# Altium PCB Panel5.PcbDoc
Units mm, origin at the board's own origin, x right, y up, seen from the top; angles counter-clockwise.
Board outline 275.21 x 86.74 mm, 2 copper layers (Top Layer, Bottom Layer); 25 components, 21 nets, 92 pads, 0 vias.
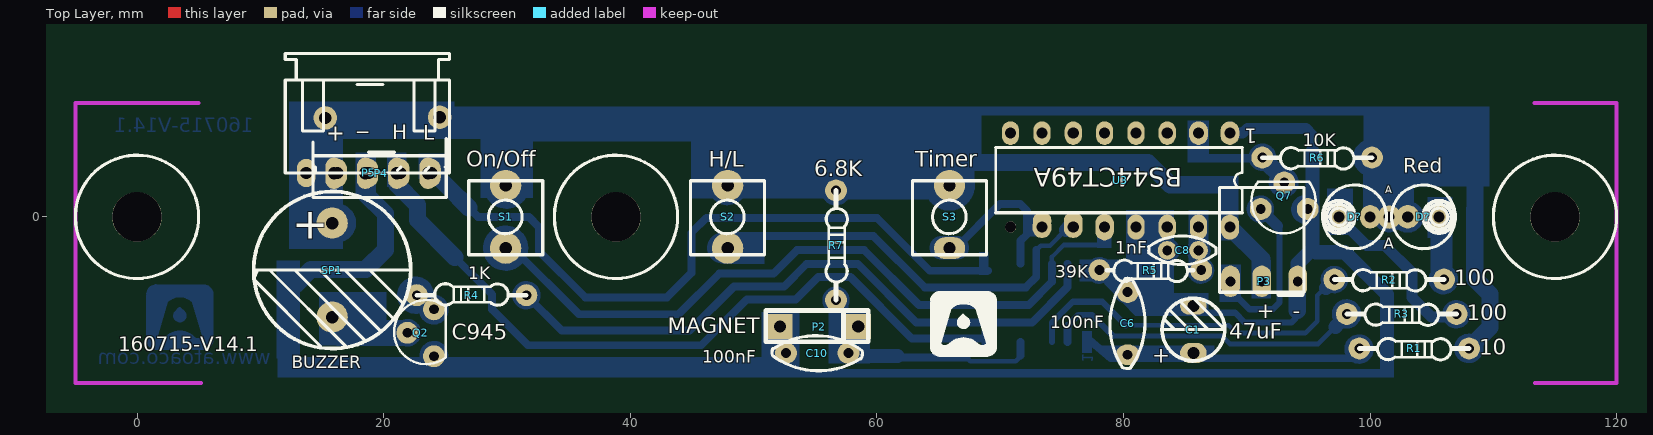
[diagram p0: Top Layer view]
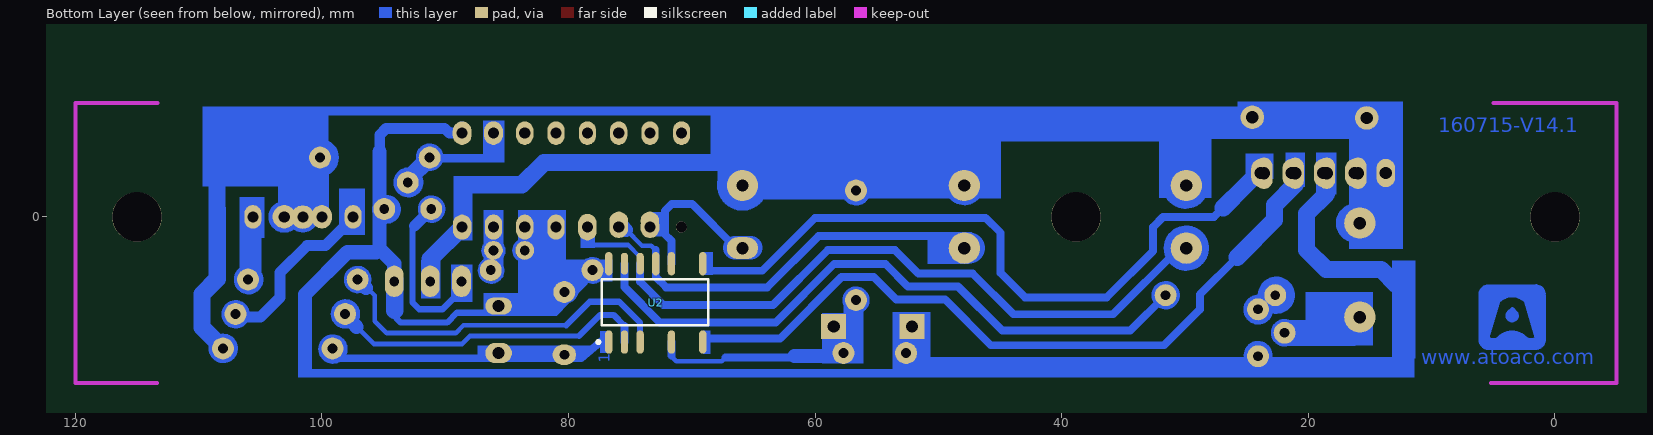
[diagram p1: Bottom Layer view, seen from below]

## Layer stack, top to bottom
Top Layer: signal copper 0.0356
Dielectric: dielectric 0.32, FR-4, Dk 4.8
Bottom Layer: signal copper 0.0356

## Board outline
172.998,27.107 -101.83,27.107 -101.83,-59.634 172.363,-59.634 173.379,-58.618

## Design rules (kind name [scope] priority, off if disabled: settings)
Clearance [All] p1: gap=0.254
PolygonConnect [All] p1: connectstyle=Relief reliefconductorwidth=0.254 reliefentries=4 polygonreliefangle="90 Angle"
RoutingVias [All] p1: holewidth=0.711 width=1.27 viastyle="Through Hole" minholewidth=0.711 minwidth=1.27 maxholewidth=0.711 maxwidth=1.27
SolderMaskExpansion [All] p1: expansion=0.102
TestPointUsage [All] p1: valid=0 allowmultiple=FALSE
Testpoint [All] p1: side=15 testpointundercomponent=TRUE minsize=1.016 maxsize=2.54 preferedsize=1.524 minholesize=0 maxholesize=1.016 preferedholesize=0.813 testpointgrid=0.025 style=1023 order=0123456789
Width [All] p1: maxlimit=1.905 minlimit=0.254 preferedwidth=0.254 toplayer_maxwidth=0.254 bottomlayer_prefwidth=0.508 minimp=50.000000 maximp=50.000000 favimp=50.000000
19 further rules are at their usual default settings.

## Components (designator, comment, footprint, x,y, rotation, side; value= is the part's Value field where it differs from the comment)
C1 "47uF" RB.15/.2 85.678,-10.414 r90 top locked
C6 "100nF" RAD0.2#1 80.344,-6.102 r270 top
C8 "1nF" RAD0.1 83.554,-2.724 r0 top locked
C10 "100nF" RAD0.2#2 52.625,-11.049 r0 top
D? "Red" LED0.5#1 104.332,0 r0 top (schematic designator Dred)
D? "Green" LED0.5#2 98.744,0 r180 top (schematic designator Dred)
P2 "Magnet" Magnet 58.5,-8.896 r180 top
P3 "IrReceiver" IRREC1 91.215,0 r0 top locked
P4 "Header 4" CON4 15.98,3.534 r270 top locked
P5 "Header 5" xH5RA 13.716,3.556 r270 top (schematic designator P4)
Q2 "C945" TO92BS2 23.448,-9.404 r270 top
Q7 "2N3904" TO92BS1 93.044,1.264 r0 top
R1 "10" RES0.35 99.14,-10.674 r0 top
R2 "100" RES0.35 97.108,-5.086 r0 top
R3 "100" RES0.35 98.124,-7.88 r0 top
R4 "1K" RES0.35 31.576,-6.356 r180 top
R5 "39K" RES0.325 78.058,-4.324 r0 top
R6 "10K" RES0.35 91.266,4.804 r0 top
R7 "6.8K" RES0.35 56.689,-6.753 r90 top
S1 "On/Off" PUSHBOT2#1 29.9,0 r270 top locked
S2 "H/L" PUSHBOT2#1 47.9,0 r270 top locked
S3 "Timer" PUSHBOT2#2 65.9,0 r270 top locked
SP1 "BUZZER" Buzzer).3/.6 15.828,-4.318 r270 top
U2 "ATtiny24A-SSU" SOIC14 76.738,-10.155 r90 bottom
U3 "BS44CT49A" DIP16 79.734,2.977 r180 top locked

## Footprints (in the part's own frame and the unit in brackets; to place one, negate y for a bottom-side part, rotate by r counter-clockwise, add the part's x,y. Pads: shape width x height; smd on the part's side, far side on the other; paste and mask are expansions set on the pad)
Buzzer).3/.6 [mil]
  round 100 hole 40: 1(150,0) 2(-150,0)
  silkscreen extent -251,-251 251,251
CON4 [mm] "100mil between pins"
  oval 2.54x1.397 hole 1: 1(0,0) 2(0,2.54) 3(0,5.08) 4(0,7.62)
  silkscreen extent -2.79,-1.7 1.96,9.1
DIP16 [mm]
  oval 1.524x1.905 hole 0.9: 1(-8.9,-3.81) 2(-6.36,-3.81)
  oval 1.397x1.905 hole 0.9: 3(-3.82,-3.81) 4(-1.28,-3.81) 5(1.26,-3.81) 6(3.8,-3.81) 7(6.34,-3.81) 8(8.9,-3.81)
  round 0.9 hole 0.9: 9(8.88,3.81)
  oval 1.524x1.778 hole 0.9: 10(6.34,3.81) 11(3.8,3.81)
  oval 1.5x2.159 hole 0.9: 12(1.26,3.81)
  oval 1.397x2.032 hole 0.9: 13(-1.28,3.81) 14(-3.82,3.81) 15(-6.36,3.81)
  oval 1.5x2.032 hole 0.9: 16(-8.9,3.81)
  silkscreen extent -9.9,-2.65 10.1,2.65
IRREC1 [mil] "38KHz Ir Receiver"
  oval 60x100 hole 31.5: 1(-99.65,-205.95) 2(0.35,-205.95) 3(115,-205.95)
  silkscreen extent -135,-249 135,94
LED0.5#1 [mm] "3 color common anode 0.5mm"
  round 1.905 hole 0.9: 1(-1.27,0)
  oval 1.397x1.905 hole 0.9: 2(1.27,0)
  silkscreen extent -2.59,-2.59 2.59,2.59
LED0.5#2 [mm] "3 color common anode 0.5mm"
  oval 1.651x1.905 hole 0.9: 1(-1.27,0)
  oval 1.397x1.905 hole 0.9: 2(1.27,0)
  silkscreen extent -2.59,-2.59 2.59,2.59
Magnet [mil]
  rect 80x80 hole 39.37: 1(0,0) 2(250,0)
  silkscreen extent -31,-51 295,49
PUSHBOT2#1 [mm] "NO-2pin"
  round 2.54 hole 1: 1(-2.54,0) 2(2.54,0)
  silkscreen extent -2.92,-3 3.08,3
PUSHBOT2#2 [mm] "NO-2pin"
  round 2.54 hole 1: 1(-2.54,0)
  oval 1.778x2.54 hole 1: 2(2.54,0)
  silkscreen extent -2.92,-3 3.08,3
RAD0.1 [mil]
  round 60 hole 31.5: 1(0,0) 2(100,0)
  silkscreen extent -59,-45 156,46
RAD0.2#1 [mil]
  round 70 hole 31.5: 1(0,0)
  oval 65x75 hole 31.5: 2(200,0)
  silkscreen extent -44,-57 244,55
RAD0.2#2 [mil]
  round 70 hole 31.5: 1(0,0) 2(200,0)
  silkscreen extent -44,-57 244,55
RB.15/.2 [mil]
  oval 65x85 hole 39.37: 1(-25,0)
  oval 55x85 hole 39.37: 2(125,0)
  silkscreen extent -50,-100 150,100
RES0.35 [mil] "Diode, Axial; Body 5.2 x 2.7 mm (LxDia. max), Lead Dia. 0.86 mm (max)"
  round 70 hole 31.5: 1(0,0)
  round 70 hole 31.5 paste+0: 2(350,0)
  silkscreen extent 0,-37 350,32
RES0.325 [mil] "Diode, Axial; Body 5.2 x 2.7 mm (LxDia. max), Lead Dia. 0.86 mm (max)"
  round 70 hole 31.5: 1(0,0)
  round 70 hole 31.5 paste+0: 2(325,0)
  silkscreen extent 24,-37 299,32
SOIC14 [mm] "SOIC, 16-Leads, Body 9.9x3.9mm, Pitch 1.27mm, IPC High Density"
  oval 1.9x0.6 smd: 1(0,0) 2(0,-1.27) 3(0,-2.54) 5(0,-5.08) 7(0,-7.62) 8(6.351,-7.62) 10(6.351,-5.08) 11(6.351,-3.81) 14(6.351,0)
  round 0 smd: 4(0,-3.81) 6(0,-6.35) 9(6.351,-6.35)
  oval 1.778x0.6 smd: 12(6.351,-2.54) 13(6.351,-1.27)
  silkscreen extent -0.12,-8.08 5.08,0.98, body extent 0.4,-8.08 5.97,0.51, height 1.75
TO92BS1 [mil] "NPN-2N3904"
  round 70 hole 31.5: 1(-75,-25) 2(0,60) 3(75,-25)
  silkscreen extent -105,-102 100,63
TO92BS2 [mil] "NPN-CC5551,C945 Base Side"
  round 70 hole 31.5: 1(-75,25) 2(0,-60) 3(75,25)
  silkscreen extent -105,-102 100,63
xH5RA [mil] "100mil between pins"
  oval 90x60 hole 39.37: 1(0,0) 2(0,100) 3(0,200) 4(0,300) 5(0,400)
  silkscreen extent -382,-67 0,458

## Part data
C1 C10: library part Cap, "Capacitor SMD"
C6 C8: library part "Cap Pol", "Polarized Capacitor (SMD)"
D? D?: library part LED0.5, "LED Radial 0.5"
P2: library part "Header 6", "Header, 6-Pin"
P3: library part "Header 3", "3pin"
P4: "Header, 4-Pin"
P5: "Header, 5-Pin"
Q2 Q7: library part BC337, "NPN General Purpose Amplifier"
R1 R2 R3 R4 R5 R6 R7: library part Resistor, "Resistor"
S1 S2 S3: library part SW-PB, "Push Botton"
U2: library part ATtiny24-16PC, "8-Bit AVR Microcontroller with 2K Bytes of Flash Memory"

## Free pads (board coordinates)
  round 1.905 hole 1: 0(24.54,8.071) 1(15.269,8.02)
  round 4 hole 4: 1(0,0) 2(115,0) 3(38.845,0)
  round 1.524 all layers, no hole: 1(75.924,-0.337) 2(73.41,-0.337)
  round 1.905 hole 0.9: 4(101.553,-0.022)

## Nets (pads, with @x,y where several pads share a name; then routed paths per layer and width w, separated by ;. In a path a pad name is that pad's centre, name@x,y a point inside that pad or via, vN(x,y) a via of type N, cw(c..) or ccw(c..) an arc to the next point about the centre after c; other vN are vias at no path point)
+5V: D?.1 P3.2 P4.1 pad.0 pad.1@15.269,8.02 pad.4 R1.2 R6.2 R7.2 S1.1 S2.1 S3.1 SP1.2 U3.16 | length 202.8
  Bottom Layer w0.381: 49.316,2.54 ccw(c47.9,2.54) 49.316,2.54 ; D?.1@102.62,-0.022 ccw(c101.553,-0.022) D?.1@102.62,-0.022 ; 104.161,0 ccw(c103.062,0) 104.161,0
  Bottom Layer w0.508: SP1.2@14.566,-0.508 cw(c16.176,-0.508) 14.964,0.553 ; 28.6,2.54 cw(c29.95,2.54) 29.9,3.889 cw(c29.95,2.54) 31.3,2.54 ; 101.325,2.566 ccw(c100.562,3.026) 101.452,3.026 ; 108.944,-10.674 ccw(c108.001,-10.674) 108.944,-10.674
  Bottom Layer w0.635: 57.587,2.137 ccw(c56.689,2.137) 57.587,2.137
  Bottom Layer w0.762: 17.388,-0.508 ccw(c16.176,-0.508) 17.388,-0.508 ; 31.455,2.54 ccw(c29.95,2.54) 31.455,2.54
  Bottom Layer w0.889: 67.517,2.559 ccw(c65.898,2.559) 67.517,2.559 ; 101.241,4.804 ccw(c100.156,4.804) 101.241,4.804
  Bottom Layer w1.397: 14.909,7.016 24.82,7.016 ; 25.099,7.016 28.345,7.016 29.463,6.889 47.756,6.889 ; S1.1 29.925,2.565 S1.1@29.95,2.54 ; 47.9,5.754 47.756,6.889 ; 57.687,2.215 57.687,5.339 ; 64.546,3.861 65.082,4.397 65.9,4.397 81.993,4.397 83.796,2.594 88.634,2.594 U3.16 91.224,-3.423 P3.2 ; 66.045,5.898 47.756,6.889 ; R6.2@100.562,5.085 105.287,5.085 ; 100.786,3.105 101.325,2.566 101.376,2.515 ; R1.2@108.005,-10.674 109.732,-8.947 109.732,-6.277 108.487,-5.032 108.487,0.608 ; 108.13,6.124 108.513,5.742 108.513,0.171
  Bottom Layer w1.905: 14.964,-1.519 14.964,0.553 14.964,6.609 15.09,6.734 ; S1.1 29.9,3.889 ; S2.1 47.9,5.464 ; S3.1 65.9,4.397 65.9,5.365
BUZZER: R4.1 U2.13 | length 57.6
  Bottom Layer w0.635: R4.1 34.446,-9.227 44.832,-9.227 48.413,-5.645 52.48,-5.645 54.309,-3.816 58.449,-3.816 63.199,-8.566 72.597,-8.566 75.468,-5.695 U2.13 ; R4.1@32.408,-6.356 ccw(c31.576,-6.356) R4.1@32.408,-6.356
GND: C1.2 C6.1 C8.1 C10.1 P2.2 P3.3 P4.2 Q2.3 Q7.3 R5.1 U2.14 U3.1 U3.13 U3.14 | length 90.3
  Bottom Layer w0.254: 79.023,-4.35 ccw(c78.055,-4.35) 79.023,-4.35 ; 84.444,-2.724 ccw(c83.554,-2.724) 84.444,-2.724
  Bottom Layer w0.381: 81.233,-5.899 ccw(c80.29,-5.899) 81.233,-5.899
  Bottom Layer w0.508: 83.342,-7.239 83.882,-7.779 87.911,-7.779 89.058,-7.779 89.856,-8.577 93.612,-8.577 93.959,-8.23 ; 24.997,-11.233 ccw(c24.076,-11.233) 24.997,-11.233 ; Q7.3@95.686,0.603 ccw(c94.771,0.603) Q7.3@95.686,0.603
  Bottom Layer w0.889: U3.1 89.671,6.787 90.047,7.163 94.797,7.163 95.315,6.645 95.315,5.537
  Bottom Layer w1.143: 82.401,-1.064 82.401,-0.632 ; U3.1@88.634,6.797 U3.1@88.634,7.163 ; P3.3 94.136,-3.786 95.337,-2.585 ; 95.337,5.28 95.337,-2.585 ; 101.375,-12.402 101.375,-6.306 97.946,-2.877 95.628,-2.877 95.337,-2.585
  Bottom Layer w1.397: 12.832,-5.537 14.105,-4.264 18.55,-4.264 20.147,-2.667 20.147,0.254 18.52,1.88 ; 94.094,-7.592 P3.3@94.094,-5.099
IRSEN: Q7.2 R6.1 U3.2 | length 19.5
  Bottom Layer w0.508: R6.1@92.13,4.829 ccw(c91.266,4.829) R6.1@92.13,4.829 ; 93.958,2.788 ccw(c92.992,2.788) 93.958,2.788
  Bottom Layer w0.635: 86.094,5.482 86.801,4.775 89.265,4.775 ; 89.813,4.775 90.27,4.775
  Bottom Layer w1.397: 86.094,5.482 U3.2 ; R6.1 93.044,3.026 Q7.2
KEY1: S1.2 U2.12 U3.12 | length 68.8
  Bottom Layer w0.356: U2.12@74.198,-3.251 75.157,-2.292
  Bottom Layer w0.381: U2.12 U2.12@74.198,-3.251 ; 75.157,-2.292 78.083,-2.292 U3.12@78.474,-1.901
  Bottom Layer w0.635: S1.2 30.477,-2.54 35.843,-7.906 43.92,-7.906 47.222,-4.604 51.617,-4.604 53.522,-2.699 58.983,-2.699 63.428,-7.144 72.318,-7.144 74.198,-5.263 U2.12 ; 31.42,-2.54 ccw(c29.9,-2.54) 31.42,-2.54
  Bottom Layer w0.889: U3.12@78.474,-1.901 U3.12
KEY2: pad.1@75.924,-0.337 S2.2 U2.11 U3.11 | length 34.1
  Bottom Layer w0.356: 73.289,-2.337 74.046,-2.337 U3.11@75.329,-1.053
  Bottom Layer w0.381: 72.928,-2.698 73.289,-2.337
  Bottom Layer w0.635: S2.2@47.4,-1.556 59.719,-1.556 63.885,-5.721 72.089,-5.721 72.928,-4.882 72.928,-3.962 U2.11 72.928,-2.698
  Bottom Layer w1.143: U3.11@75.329,-1.053 U3.11@75.586,-0.797
  Bottom Layer w2.54: S2.2@47.502,-2.521 S2.2@48.391,-2.521
KEY3: pad.2@73.41,-0.337 S3.2 U2.10 U3.10 | length 15.5
  Bottom Layer w0.635: S3.2@65.841,-2.521 65.9,-2.462 65.9,-2.521 S3.2 66.406,-2.54 69.981,1.035 71.632,1.035 72.191,0.476 72.191,-1.098 ; U2.10 71.658,-1.936 72.191,-1.403 72.191,-1.098 ; 72.482,-0.655 72.191,-1.098
  Bottom Layer w1.143: 72.482,-0.655 U3.10@73.42,-0.655
  Bottom Layer w1.905: S3.2@65.206,-2.521 S3.2@66.538,-2.521
LED1: R2.1 U2.3 | length 34.5
  Bottom Layer w0.381: 80.192,-8.795 88.523,-8.795 89.158,-9.43 94.746,-9.43 95.711,-8.465 95.711,-6.382 96.194,-5.899 ; R2.1@97.26,-4.948 R2.1@97.565,-5.252
  Bottom Layer w0.508: U2.3 74.198,-8.585 75.905,-6.878 78.275,-6.878 80.192,-8.795 ; R2.1@97.972,-5.086 ccw(c97.108,-5.086) R2.1@97.972,-5.086
  Bottom Layer w1.143: 96.422,-5.772 R2.1@96.849,-5.346
LED2: R3.1 U2.2 | length 34.7
  Bottom Layer w0.381: 79.15,-9.658 87.989,-9.658 88.64,-10.309 95.797,-10.309 97.184,-8.922
  Bottom Layer w0.508: 75.468,-8.845 76.356,-7.957 77.448,-7.957 79.15,-9.658 ; 97.153,-7.88 ccw(c98.095,-7.88) 97.497,-8.609 ccw(c98.095,-7.88) 99.038,-7.88 ; 99.038,-7.88 ccw(c98.095,-7.88) 99.038,-7.88
  Bottom Layer w0.635: U2.2 75.468,-8.845
  Bottom Layer w1.143: 97.184,-8.922 97.497,-8.609 R3.1@97.8,-8.306
MAGNET: C10.2 P2.1 R7.1 U2.5 | length 23.7
  Bottom Layer w0.381: 60.38,-11.452 60.43,-11.402 62.025,-11.402 ; 67.279,-11.402 67.593,-11.716 71.258,-11.716 71.725,-11.249
  Bottom Layer w0.635: 62.025,-11.402 67.279,-11.402 ; 71.658,-11.249 U2.5 ; R7.1@57.484,-6.763 ccw(c56.689,-6.763) R7.1@57.484,-6.763
  Bottom Layer w1.143: 58.956,-11.3 61.675,-11.3
  Bottom Layer w1.651: 56.895,-10.182 R7.1@56.895,-6.98
NetC8_2: C8.2 R5.2 U3.15 | length 15
  Bottom Layer w0.254: 86.958,-2.75 ccw(c86.094,-2.75) 86.958,-2.75 ; 87.253,-4.35 ccw(c86.288,-4.35) 87.253,-4.35
  Bottom Layer w1.397: R5.2@86.094,-4.324 U3.15
NetD1_2: D?.2@105.602,0 R2.2 | length 5.6
  Bottom Layer w0.635: R2.2@106.836,-5.086 ccw(c105.949,-5.086) R2.2@106.836,-5.086
NetD1_3: D?.2@97.474,0 R3.2 | length 19.3
  Bottom Layer w0.508: 107.903,-7.906 ccw(c107.006,-7.906) 107.903,-7.906
  Bottom Layer w0.889: D?.2@97.474,0 97.474,-0.093 99.699,-2.318 101.197,-2.318 103.407,-4.528 103.407,-6.55 104.991,-8.134 R3.2@106.506,-8.134
NetP3_1: P3.1 Q7.1 | length 19.8
  Bottom Layer w0.508: P3.1@88.684,-5.302 P3.1 ; P3.1@88.684,-4.685 P3.1 ; 92.511,-0.794 92.663,-0.946 92.663,-6.941 92.104,-7.499 90.225,-7.499 88.684,-5.959 P3.1 ; Q7.1@91.977,0.629 ccw(c91.114,0.629) Q7.1@91.977,0.629
  Bottom Layer w0.889: Q7.1 92.511,-0.743
NetQ2_1: Q2.1 R4.2 | length 12.3
  Bottom Layer w0.508: 25.023,-7.525 ccw(c24.065,-7.525) 25.023,-7.525
  Bottom Layer w1.016: 23.6,-6.356 ccw(c22.599,-6.356) 23.6,-6.356
NetQ2_2: Q2.2 SP1.1 | length 5.5
  Bottom Layer w0.508: Q2.2@22.788,-9.404 ccw(c21.917,-9.404) Q2.2@22.788,-9.404
RELAY1: P4.4 U2.8 | length 60
  Bottom Layer w0.635: 25.176,2.466 27.662,-0.02 31.793,-0.02 32.592,-0.819 32.592,-2.775 36.351,-6.534 42.981,-6.534 44.962,-4.553 44.962,-1.302 46.181,-0.083 60.006,-0.083 64.299,-4.375 U2.8@69.016,-4.375 ; P4.4@23.6,4.042 23.725,4.042 P4.4@23.6,4.042
  Bottom Layer w1.397: P4.4@23.6,4.042 25.176,2.466 ; 25.176,2.464 25.176,2.466 ; 26.902,0.74 25.176,2.466
RELAY2: P4.3 U2.7 | length 60.7
  Bottom Layer w0.635: 25.777,-3.275 28.789,-6.287 28.789,-7.507 31.703,-10.42 45.749,-10.42 49.458,-6.712 53.42,-6.712 55.249,-4.883 57.865,-4.883 62.843,-9.862 68.788,-9.862
  Bottom Layer w1.397: P4.3@21.071,4.394 21.06,4.042 21.06,2.642 22.751,0.952 22.751,-0.249 25.777,-3.275 25.794,-3.292
RST: U2.4
SCK: U2.9
VMIC: C1.1 C6.2 R1.1 U2.1 | length 28.4
  Bottom Layer w0.508: 100.054,-10.725 ccw(c99.111,-10.725) 100.054,-10.725
  Bottom Layer w0.635: 77.192,-9.941 78.993,-11.475 98.327,-11.475
  Bottom Layer w1.143: R1.1@98.607,-11.208 R1.1
pads on no net: P5.1 P5.2 P5.3 P5.4 P5.5 U2.6 U3.3 U3.4 U3.5 U3.6 U3.7 U3.8 U3.9
copper on no net: | length 34.9
  Bottom Layer w0.254: 0.867,-6.358 0.867,-9.914 ccw(c1.566,-9.978) 1.502,-10.676 5.312,-10.676 ccw(c5.376,-9.978) 6.074,-10.041 6.074,-6.358 ccw(c5.376,-6.295) 5.439,-5.596 1.629,-5.596 ccw(c1.566,-6.295) 0.867,-6.231 ; 1.502,-9.787 ccw(c1.947,-9.343) 2.391,-9.787 cw(c3.471,-10.867) 4.55,-9.787 ccw(c4.995,-9.343) 5.439,-9.787 4.567,-6.929 ; 1.528,-9.787 2.391,-6.866 cw(c3.471,-7.946) 4.55,-6.866 ; 3.141,-7.757 ccw(c3.473,-8.014) 3.801,-7.751 3.429,-7.427 3.141,-7.757

## Keep-outs
Keep-Out Layer:
  lines w0.305: 5,9.232 -5,9.232 -5,-13.468 5.211,-13.468 ; 113.339,9.232 120,9.232 120,-13.468 113.389,-13.468

## Other copper
Bottom Layer:
  rectangle net NetQ2_2: 14.762,-10.446 20.24,-6.093
  rectangle net +5V: 12.333,6.731 31.728,8.934
  rectangle net VMIC: 76.653,-11.03 77.436,-9.268
  rectangle net RELAY1: 68.297,-4.721 69.054,-2.872
  rectangle net RELAY1: 22.814,3.086 25.08,5.131
  rectangle net RELAY2: 20.274,2.438 21.874,5.235
  rectangle net GND: 17.708,1.829 19.385,5.21
  rectangle net VMIC: 78.261,-11.208 87.406,-10.439
  rectangle net +5V: 12.324,-2.616 16.715,7.699
  rectangle net +5V: 99.47,2.467 109.706,8.934
  rectangle net NetQ2_2: 16.192,-10.497 21.772,-8.363
  rectangle net +5V: 27.839,1.543 32.109,7.258
  rectangle net +5V: 44.936,1.467 67.187,7.309
  rectangle net MAGNET: 56.079,-11.884 59.465,-7.82
  rectangle net GND: 80.217,-6.788 84.103,0.562
  rectangle net +5V: 56.613,1.425 66.169,2.035
  rectangle net GND: 76.458,-5.242 80.545,-3.461
  rectangle net NetD1_2: 104.906,-5.239 106.684,1.559
  rectangle net IRSEN: 85.196,5.004 86.949,7.823
  rectangle net IRSEN: 85.196,4.394 90.581,5.105
  rectangle net +5V: 31.728,6.115 68.508,8.934
  rectangle net NetC8_2: 85.272,-4.883 86.897,0.559
  rectangle net +5V: 87.787,-1.905 89.336,3.302
  rectangle net GND: 94.713,-0.429 95.348,1.654
  rectangle net +5V: 99.445,-0.607 103.56,3.457
  rectangle net +5V: 67.441,8.207 109.706,8.934
  rectangle net GND: 49.991,-13.037 101.934,-12.351
  rectangle net GND: 11.408,-13.037 51.109,-11.36
  rectangle net GND: 11.307,-11.487 13.237,-3.537
  rectangle net NetD1_2: 104.677,-1.708 106.684,1.594
  rectangle net +5V: 90.377,-6.636 91.952,-3.483
  rectangle net NetP3_1: 87.812,-6.915 89.539,-3.867
  rectangle net GND: 83.29,-7.973 86.917,-6.179
  rectangle net NetD1_3: 96.498,-1.48 98.632,2.305
  rectangle net GND: 50.651,-12.63 53.725,-7.703
  rectangle net RELAY2: 68.482,-11.106 69.117,-9.201
  rectangle net +5V: 65.333,4.159 68.5,6.115
  rectangle net +5V: 67.238,2.991 67.923,4.159
  rectangle net KEY2: 49.153,-2.597 49.661,-1.556
  rectangle net KEY2: 47.502,-3.816 50.88,-1.226
  rectangle net +5V: 12.333,8.934 25.734,9.366
  rectangle net KEY1: 77.855,-2.521 79.023,-1.302
  rectangle net KEY3: 72.292,-1.607 73.42,0.4
  region net GND: 78.007,-4.934 80.979,-8.007 84.56,-8.007 84.52,-7.973 80.622,-4.137 80.088,-4.671 78.482,-4.442
  region: 1.375,-5.596 5.439,-5.596 5.82,-5.723 5.947,-6.104 5.947,-9.914 6.074,-10.041 5.947,-10.422 5.566,-10.549 1.629,-10.549 1.502,-10.676 1.121,-10.422 0.867,-10.041 0.867,-9.406 1.248,-9.533 1.717,-9.147 1.841,-8.729 2.391,-6.866 2.899,-6.485 3.915,-6.358 4.423,-6.866 4.55,-6.866 4.55,-7.06 4.801,-7.31 4.801,-7.944 5.013,-8.156 5.013,-8.745 5.259,-8.99 5.259,-9.445 5.439,-9.626 5.439,-9.787 5.312,-9.787 5.058,-10.041 4.677,-10.041 4.042,-9.406 2.772,-9.406 2.264,-9.914 1.629,-9.914 1.502,-9.787 1.717,-9.147 1.248,-9.533 0.867,-9.406 0.867,-6.231
  region: 3.568,-7.548 3.788,-7.768 3.788,-8.136 3.534,-8.39 3.28,-8.39 3.153,-8.263 3.153,-7.77 3.141,-7.757
  text "160715-V14.1" at 9.478,6.471 h2.03
  text "1" at 76.356,-11.833 h1.52 r270
  text "www.atoaco.com" at 10.85,-12.376 h2.03

## Silkscreen, mask and mechanical layers (free items; w line width, h text height)
Top Overlay:
  circle w0.254: c38.845,0 r5
  circle w0.254: c0,0 r5
  circle w0.254: c115,0 r5
  region: 64.936,-6.142 69,-6.142 69.381,-6.269 69.508,-6.65 69.508,-10.46 69.635,-10.587 69.508,-10.968 69.127,-11.095 65.19,-11.095 65.063,-11.222 64.682,-10.968 64.428,-10.587 64.428,-9.952 64.809,-10.079 65.278,-9.693 65.402,-9.275 65.952,-7.412 66.46,-7.031 67.476,-6.904 67.984,-7.412 68.111,-7.412 68.111,-7.605 68.362,-7.856 68.362,-8.49 68.574,-8.702 68.574,-9.29 68.82,-9.536 68.82,-9.991 69,-10.171 69,-10.333 68.873,-10.333 68.619,-10.587 68.238,-10.587 67.603,-9.952 66.333,-9.952 65.825,-10.46 65.19,-10.46 65.063,-10.333 65.278,-9.692 64.809,-10.079 64.428,-9.952 64.428,-6.777
  region: 67.129,-8.093 67.349,-8.314 67.349,-8.682 67.095,-8.936 66.841,-8.936 66.714,-8.809 66.714,-8.315 66.702,-8.303
  lines w0.254: 64.428,-6.904 64.428,-10.46 ccw(c65.127,-10.523) 65.063,-11.222 68.873,-11.222 ccw(c68.937,-10.523) 69.635,-10.587 69.635,-6.904 ccw(c68.937,-6.84) 69,-6.142 65.19,-6.142 ccw(c65.127,-6.84) 64.428,-6.777 ; 65.063,-10.333 ccw(c65.508,-9.888) 65.952,-10.333 cw(c67.032,-11.412) 68.111,-10.333 ccw(c68.556,-9.888) 69,-10.333 68.128,-7.474 ; 65.089,-10.333 65.952,-7.412 cw(c67.032,-8.491) 68.111,-7.412 ; 66.702,-8.303 ccw(c67.034,-8.56) 67.362,-8.297 66.991,-7.973 66.702,-8.303
  text "1" at 90.834,7.563 h2.03 r180
  text "_" at 17.86,6.775 h2.29
  text "H" at 20.679,5.886 h2.03
  text "L" at 23.194,5.836 h2.03
  text "+" at 15.345,5.709 h2.29
  text "Red" at 102.681,3.175 h2.03
  text "+" at 12.595,-1.775 h2.54
  text "+" at 90.809,-8.236 h1.27
  text "-" at 93.73,-8.236 h1.27
  text "MAGNET" at 43.031,-9.43 h1.27
  text "160715-V14.1" at -1.52,-11.309 h2.03
  text "+" at 82.351,-11.817 h1.27

## Text inside footprints (layer, text, board x,y; h text height)
D?: Top Overlay "A" at 101.248,1.721 h1
D?: Top Overlay "A" at 101.121,-2.927 h1.52